# Altium PCB BD658T_AMP_ES4_220615_F.PcbDoc (part 3 of 4)
Units mm, origin at the board's own origin, x right, y up, seen from the top; angles counter-clockwise.
Board outline 153 x 112 mm, 4 copper layers (TOP, LAYER2, LAYER3, BOTTOM), stack 1.59 mm thick; 286 components, 184 nets, 896 pads, 614 vias.
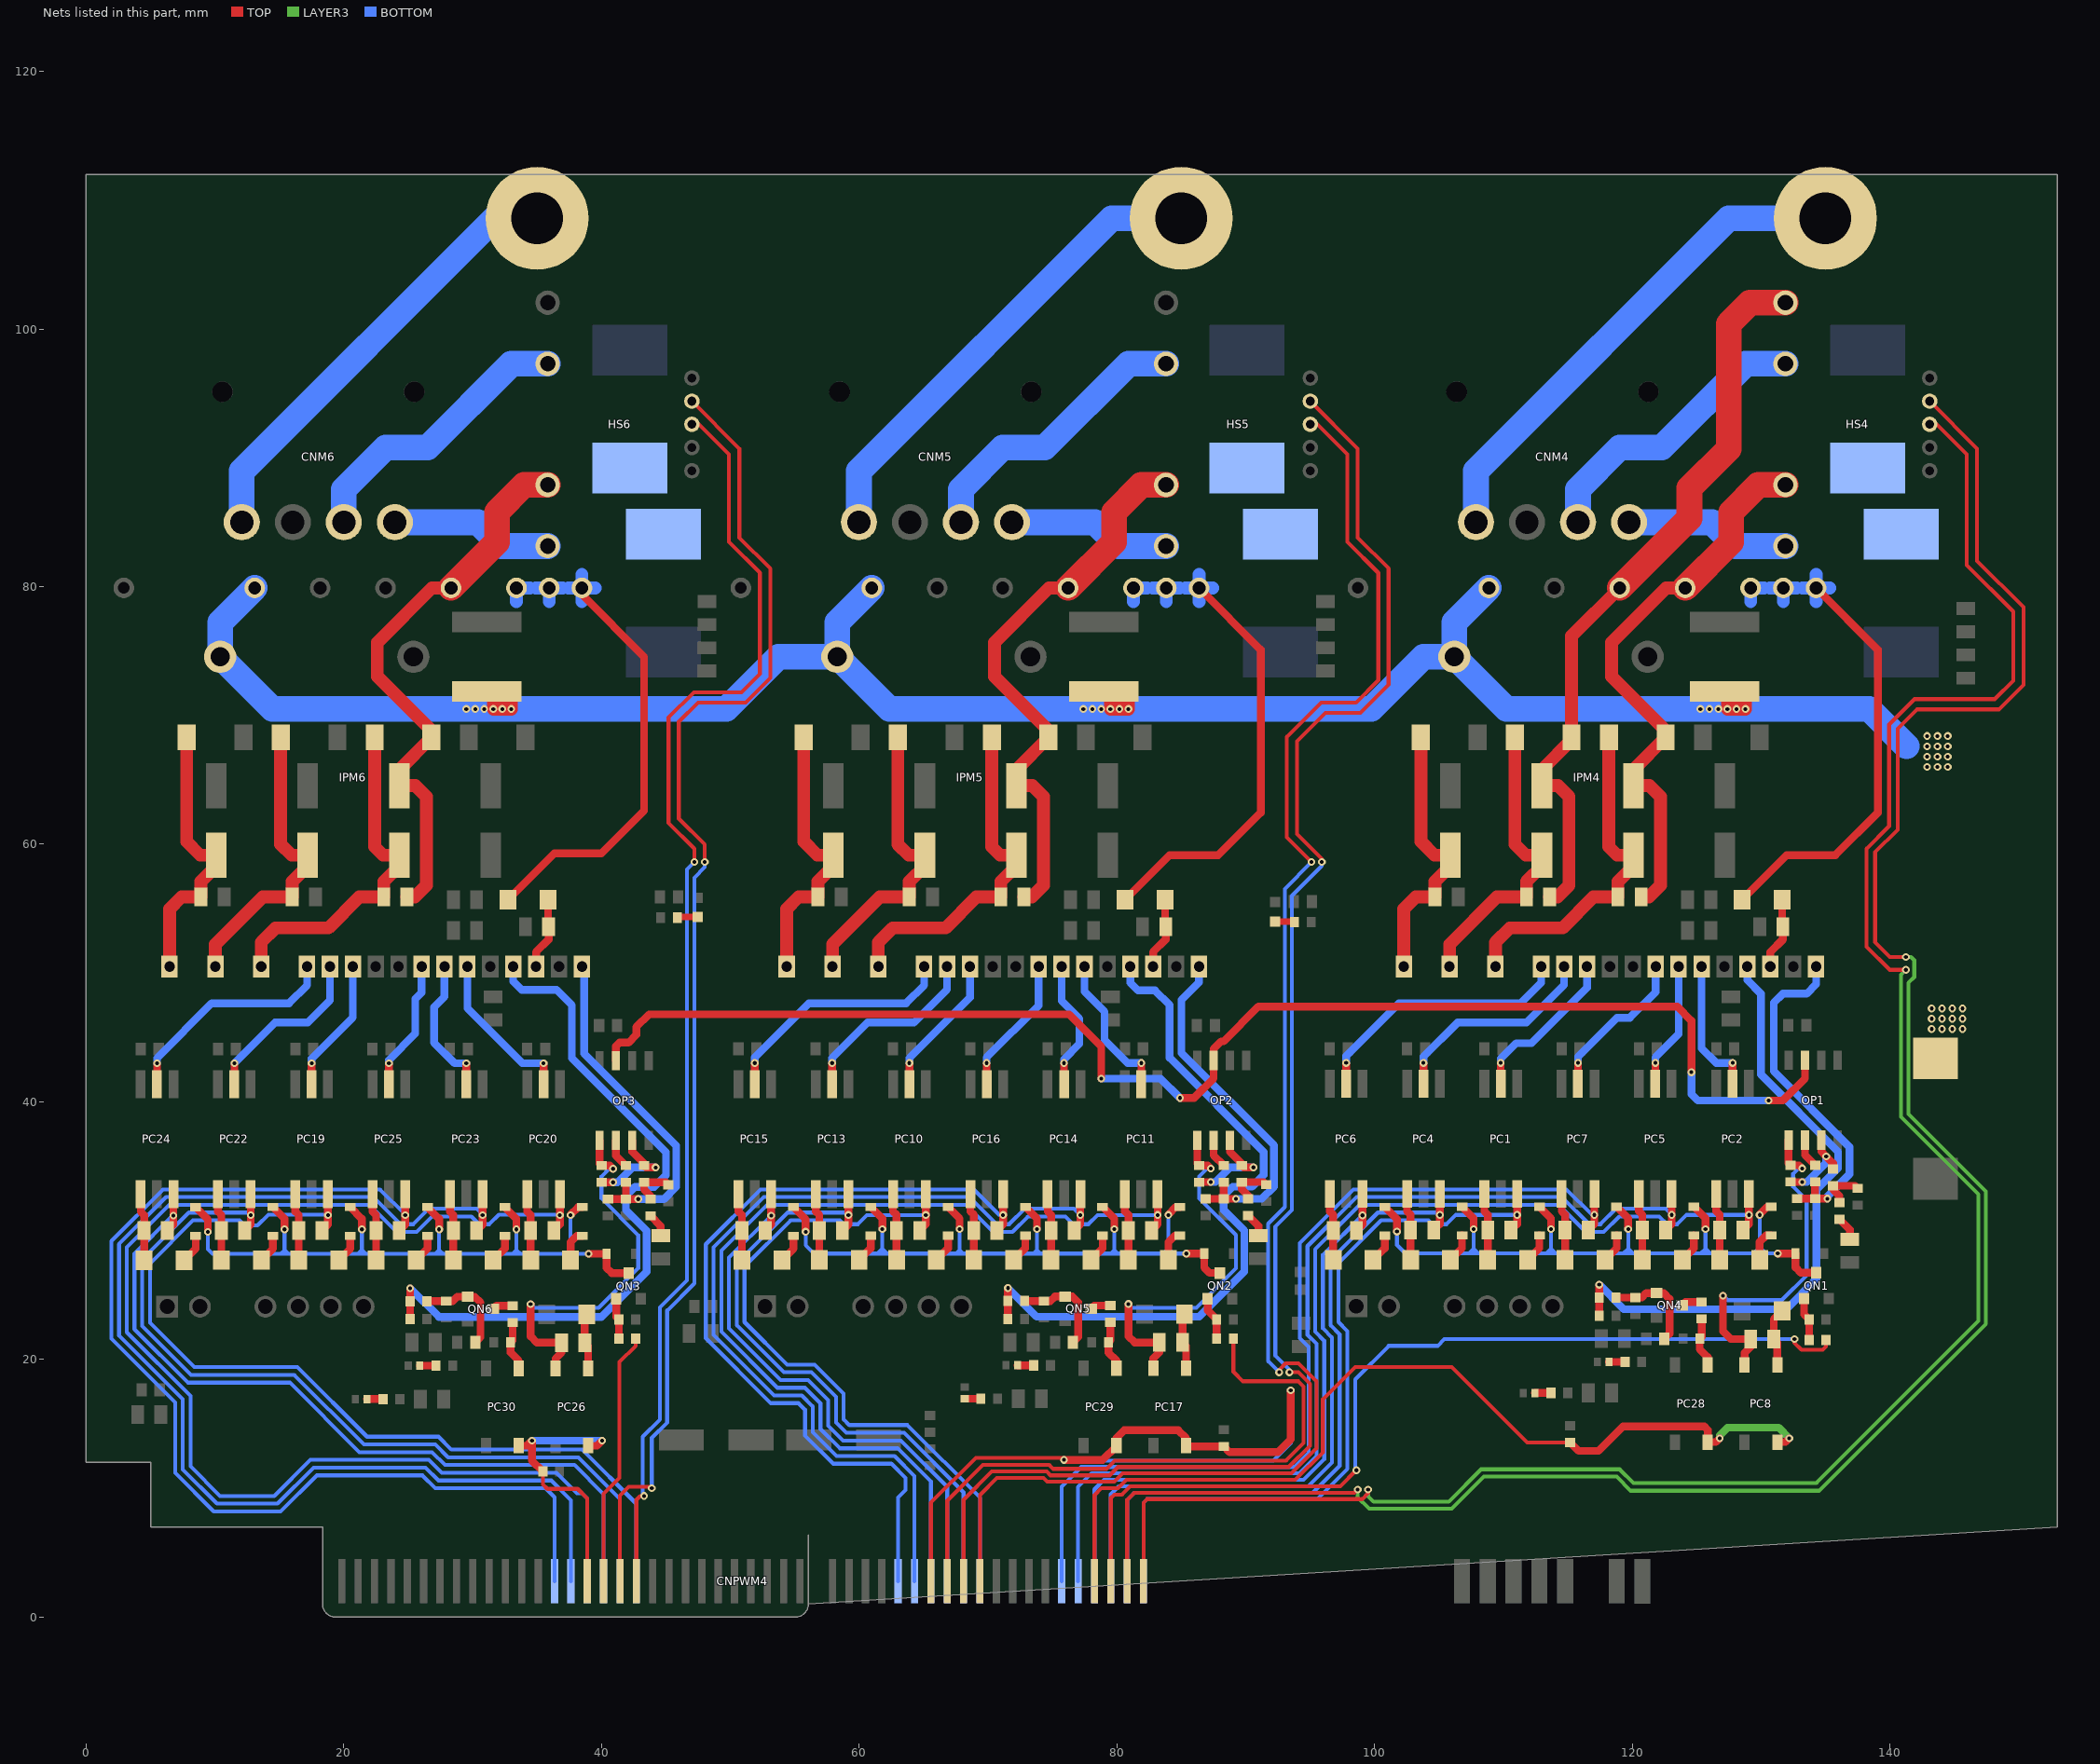
[diagram p5: the nets of this part, all layers, seen from the top]

## Via types
v1: diameter 0.6, hole 0.3, TOP to BOTTOM, 546 vias
v2: diameter 0.4, hole 0.4, TOP to BOTTOM, 56 vias
v3: diameter 6.5, hole 6.5, TOP to BOTTOM, 6 vias
v4: diameter 0.1/0.1/0.1/0.1 (per signal layer), hole 4, TOP to BOTTOM, 4 vias
v5: diameter 4, hole 4, TOP to BOTTOM, 2 vias

## Nets (pads, with @x,y where several pads share a name; then routed paths per layer and width w, separated by ;. In a path a pad name is that pad's centre, name@x,y a point inside that pad or via, vN(x,y) a via of type N, cw(c..) or ccw(c..) an arc to the next point about the centre after c; other vN are vias at no path point) (continued)
FLT4: CNPWM4.8 PC8.4 PC28.4 R19.1 | length 73.7
  TOP w0.3: CNPWM4.8@78.266,2.775 78.266,9.466 78.8,10 80.1,10 80.748,10.649 93.849,10.649 96,12.8 96,16.9 98.5,19.4 106,19.4 111.85,13.55 R19.1@115.2,13.55
  TOP w0.6: R19.1@115.2,13.55 115.85,12.9 117.4,12.9 119.3,14.8 125.6,14.8 125.87,14.53 PC28.4@125.87,13.577 126.5,13.577 v1(126.8,13.877) ; PC8.4@131.27,13.577 131.9,13.577 v1(132.2,13.877)
  LAYER3 w0.6: v1(126.8,13.877) 126.8,14.1 127.4,14.7 131.377,14.7 v1(132.2,13.877)
FLT5: CNPWM4.28 PC17.4 PC29.4 R50.1 | length 64.4
  TOP w0.3: CNPWM4.28@65.566,2.775 65.566,8.866 69.05,12.35 75.75,12.35 v1(75.9,12.2)
  TOP w0.6: v1(75.9,12.2) 78.9,12.2 79.97,13.27 PC29.4@79.97,13.314 79.97,13.9 80.57,14.5 84.77,14.5 85.37,13.9 PC17.4@85.37,13.314 85.434,13.25 R50.1@88.3,13.25 88.75,12.8 92.5,12.8 93.5,13.8 v1(93.5,17.6)
  BOTTOM w0.3: v1(75.9,12.2) 75.951,12.149 92.149,12.149 93.5,13.5 v1(93.5,17.6)
FLT6: CNPWM4.68 PC26.4 PC30.4 R81.1 | length 22
  TOP w0.3: R81.1@35.45,11.3 35.45,10.3 35.8,9.95 38.15,9.95 38.896,9.204 CNPWM4.68@38.896,2.775
  TOP w0.6: PC30.4@33.57,13.3 34.2,13.3 v1(34.6,13.7) 34.6,12.15 R81.1@35.45,11.3 ; PC26.4@38.97,13.3 39.65,13.3 v1(40.05,13.7)
  BOTTOM w0.6: v1(34.6,13.7) v1(40.05,13.7)
IPM_UN4: IPM4.12 PC2.5 | length 10.9
  TOP w0.6: PC2.5@127.8,41.393 v1(127.8,43.023)
  BOTTOM w0.6: IPM4.12@125.39,50.5 125.39,44.16 126.527,43.023 v1(127.8,43.023)
IPM_UN5: IPM5.12 PC11.5 | length 11.6
  TOP w0.6: PC11.5@81.9,41.379 v1(81.9,43.009)
  BOTTOM w0.6: IPM5.12@77.49,50.5 77.49,48.56 79.05,47 79.05,44.8 80.841,43.009 v1(81.9,43.009)
IPM_UN6: IPM6.12 PC20.5 | length 12.5
  TOP w0.6: PC20.5@35.5,41.37 v1(35.5,43)
  BOTTOM w0.6: IPM6.12@29.59,50.5 29.59,47.26 33.85,43 v1(35.5,43)
IPM_UP4: IPM4.7 PC1.5 | length 12.6
  TOP w0.6: PC1.5@109.8,41.393 v1(109.8,43.023)
  BOTTOM w0.6: v1(109.8,43.023) 109.8,43.35 111,44.55 112.2,44.55 116.5,48.85 IPM4.7@116.5,50.5
IPM_UP5: IPM5.7 PC10.5 | length 11.1
  TOP w0.6: PC10.5@63.9,41.379 v1(63.9,43.009)
  BOTTOM w0.6: v1(63.9,43.009) 63.9,43.4 68.6,48.1 IPM5.7@68.6,50.5
IPM_UP6: IPM6.7 PC19.5 | length 10.5
  TOP w0.6: PC19.5@17.5,41.37 v1(17.5,43)
  BOTTOM w0.6: v1(17.5,43) 17.5,43.35 20.7,46.55 IPM6.7@20.7,50.5
IPM_VN4: IPM4.11 PC5.5 | length 9.9
  TOP w0.6: PC5.5@121.8,41.393 v1(121.8,43.023)
  BOTTOM w0.6: v1(121.8,43.023) 121.8,43.45 123.612,45.262 IPM4.11@123.612,50.5
IPM_VN5: IPM5.11 PC14.5 | length 10.2
  TOP w0.6: PC14.5@75.9,41.379 v1(75.9,43.009)
  BOTTOM w0.6: IPM5.11@75.712,50.5 75.712,47.838 77.1,46.45 77.1,44.5 75.9,43.3 v1(75.9,43.009)
IPM_VN6: IPM6.11 PC23.5 | length 11
  TOP w0.6: PC23.5@29.5,41.37 v1(29.5,43)
  BOTTOM w0.6: IPM6.11@27.812,50.5 27.812,48.162 27,47.35 27,44.6 28.6,43 v1(29.5,43)
IPM_VP4: IPM4.6 PC4.5 | length 16.8
  TOP w0.6: PC4.5@103.8,41.393 v1(103.8,43.023)
  BOTTOM w0.6: v1(103.8,43.023) 103.8,43.5 106.45,46.15 111.8,46.15 114.722,49.072 IPM4.6@114.722,50.5
IPM_VP5: IPM5.6 PC13.5 | length 14.9
  TOP w0.6: PC13.5@57.9,41.379 v1(57.9,43.009)
  BOTTOM w0.6: v1(57.9,43.009) 57.9,43.4 60.65,46.15 64.25,46.15 66.822,48.722 IPM5.6@66.822,50.5
IPM_VP6: IPM6.6 PC22.5 | length 13.7
  TOP w0.6: PC22.5@11.5,41.37 v1(11.5,43)
  BOTTOM w0.6: v1(11.5,43) 14.65,46.15 17.2,46.15 18.922,47.872 IPM6.6@18.922,50.5
IPM_WN4: IPM4.10 PC7.5 | length 12.2
  TOP w0.6: PC7.5@115.8,41.393 v1(115.8,43.023)
  BOTTOM w0.6: v1(115.8,43.023) 115.8,43.5 118.825,46.525 119.825,46.525 121.834,48.534 IPM4.10@121.834,50.5
IPM_WN5: IPM5.10 PC16.5 | length 10.8
  TOP w0.6: PC16.5@69.9,41.379 v1(69.9,43.009)
  BOTTOM w0.6: v1(69.9,43.009) 69.9,43.45 73.934,47.484 IPM5.10@73.934,50.5
IPM_WN6: IPM6.10 PC25.5 | length 10.2
  TOP w0.6: PC25.5@23.5,41.37 v1(23.5,43)
  BOTTOM w0.6: v1(23.5,43) 23.5,43.25 25.55,45.3 25.55,48 26.034,48.484 IPM6.10@26.034,50.5
IPM_WP4: IPM4.5 PC6.5 | length 20.9
  TOP w0.6: PC6.5@97.8,41.393 v1(97.8,43.023)
  BOTTOM w0.6: v1(97.8,43.023) 97.8,43.55 101.9,47.65 111.35,47.65 112.944,49.244 IPM4.5@112.944,50.5
IPM_WP5: IPM5.5 PC15.5 | length 19
  TOP w0.6: PC15.5@51.9,41.379 v1(51.9,43.009)
  BOTTOM w0.6: v1(51.9,43.009) 51.9,43.45 56.1,47.65 63.65,47.65 65.044,49.044 IPM5.5@65.044,50.5
IPM_WP6: IPM6.5 PC24.5 | length 17.5
  TOP w0.6: PC24.5@5.5,41.37 v1(5.5,43)
  BOTTOM w0.6: v1(5.5,43) 5.5,43.4 9.75,47.65 15.75,47.65 17.144,49.044 IPM6.5@17.144,50.5
N274757: R25.2 R26.2 R27.1 | length 3.5
  TOP w0.6: R25.2@136.1,32.177 136.1,32.7 135.6,33.2 R26.2@135.6,33.477 137.3,33.477 R27.1@137.5,33.277
N274773: D1.2 D2.2 D3.2 D4.2 D5.2 D6.2 D7.2 QN1.3 | length 63.2
  TOP w0.6: D5.2@100.8,31.838 101.75,30.888 v1(101.75,29.923) ; D3.2@106.8,31.852 107.7,30.952 v1(107.7,30.123) ; D1.2@112.8,31.852 113.7,30.952 v1(113.7,30.123) ; D6.2@118.8,31.852 119.7,30.952 v1(119.7,30.123) ; D4.2@124.8,31.852 125.7,30.952 v1(125.7,30.123) ; v1(129.9,31.223) 129.9,31.262 130.49,31.852 D2.2@130.8,31.852 ; v1(131.3,28.227) D7.2@132.685,28.227 132.685,27.142 133.1,26.727 QN1.3@134.3,26.727
  BOTTOM w0.3: v1(101.75,29.923) 101.75,28.877 102.4,28.227 107.327,28.227 ; v1(107.7,30.123) 107.7,28.6 ; v1(113.7,30.123) 113.7,28.6 ; v1(119.7,30.123) 119.7,28.6 ; v1(125.7,30.123) 125.7,28.6 ; v1(129.9,31.223) 129.9,28.7 ; v1(131.3,28.227) 130.373,28.227 ; 107.327,28.227 107.7,28.227 ; 107.327,28.227 107.7,28.6 ; 107.7,28.227 107.7,28.6 ; 107.7,28.227 108.072,28.227 ; 107.7,28.6 108.072,28.227 ; 108.072,28.227 113.327,28.227 ; 113.327,28.227 113.7,28.6 ; 113.327,28.227 113.7,28.227 ; 113.7,28.227 113.7,28.6 ; 113.7,28.227 114.072,28.227 ; 113.7,28.6 114.072,28.227 ; 114.072,28.227 119.327,28.227 ; 119.327,28.227 119.7,28.6 ; 119.327,28.227 119.7,28.227 ; 119.7,28.227 120.073,28.227 ; 119.7,28.227 119.7,28.6 ; 119.7,28.6 120.073,28.227 ; 120.073,28.227 125.327,28.227 ; 125.327,28.227 125.7,28.6 ; 125.327,28.227 125.7,28.227 ; 125.7,28.227 125.7,28.6 ; 125.7,28.227 126.073,28.227 ; 125.7,28.6 126.073,28.227 ; 126.073,28.227 129.427,28.227 ; 129.427,28.227 129.9,28.227 ; 129.427,28.227 129.9,28.7 ; 129.9,28.227 129.9,28.7 ; 129.9,28.227 130.373,28.227 ; 129.9,28.7 130.373,28.227
N275195: OP1.2 R29.1 | length 2.3
  TOP w0.6: OP1.2@133.415,37.027 133.415,35.862 R29.1@134.2,35.077
N276741: PC1.1 R3.1 R4.2 | length 5.2
  TOP w0.6: PC1.1@108.53,32.853 108.53,31.507 108.8,31.237 R3.1@108.8,30.037 R4.2@108.8,27.737
N277069: D1.1 R4.1 | length 2.3
  TOP w0.6: R4.1@111.9,27.737 112.8,28.637 D1.1@112.8,29.622
N277219: PC2.1 R5.2 R6.1 | length 5.2
  TOP w0.6: PC2.1@126.53,32.853 126.53,31.507 126.8,31.237 R6.1@126.8,30.037 R5.2@126.8,27.737
N277271: D2.1 R5.1 | length 2.5
  TOP w0.6: R5.1@129.9,27.737 129.9,29.123 130.398,29.622 D2.1@130.8,29.622
N277453: PC4.1 R9.2 R10.1 | length 5.2
  TOP w0.6: PC4.1@102.53,32.853 102.53,31.507 102.8,31.237 R10.1@102.8,30.037 R9.2@102.8,27.737
N277477: D3.1 R9.1 | length 2.3
  TOP w0.6: R9.1@105.9,27.737 106.8,28.637 D3.1@106.8,29.622
N277499: PC5.1 R11.2 R12.1 | length 5.2
  TOP w0.6: PC5.1@120.53,32.853 120.53,31.507 120.8,31.237 R12.1@120.8,30.037 R11.2@120.8,27.737
N277523: D4.1 R11.1 | length 2.3
  TOP w0.6: R11.1@123.9,27.737 124.8,28.637 D4.1@124.8,29.622
N277545: PC6.1 R13.2 R14.1 | length 5.2
  TOP w0.6: PC6.1@96.53,32.853 96.53,31.493 96.8,31.223 R14.1@96.8,30.023 R13.2@96.8,27.723
N277565: D5.1 R13.1 | length 2.3
  TOP w0.6: R13.1@99.9,27.723 100.8,28.623 D5.1@100.8,29.608
N277587: PC7.1 R16.2 R18.1 | length 5.2
  TOP w0.6: PC7.1@114.53,32.853 114.53,31.507 114.8,31.237 R18.1@114.8,30.037 R16.2@114.8,27.737
N277615: D6.1 R16.1 | length 2.3
  TOP w0.6: R16.1@117.9,27.737 118.8,28.637 D6.1@118.8,29.622
N277743: OP1.3 R23.2 R26.1 | length 6.5
  TOP w0.6: R23.2@132.3,33.777 v1(133.2,33.777) ; OP1.3@134.685,37.027 134.685,36.142 v1(135.063,35.764) 135.6,35.227 R26.1@135.6,34.777
  BOTTOM w0.6: v1(133.2,33.777) 133.577,33.777 135.063,35.263 v1(135.063,35.764)
N277793: OP1.1 PC8.2 R23.1 R24.2 | length 27
  TOP w0.6: v1(127.05,24.95) 127.05,22.177 127.65,21.577 R24.2@129.2,21.577 129.2,20.977 128.73,20.507 PC8.2@128.73,19.577 ; OP1.1@132.145,37.027 132.145,35.232 R23.1@132.3,35.077 132.95,35.077 v1(133.2,34.827)
  BOTTOM w0.3: v1(127.05,24.95) 127.4,24.6 131.62,24.6 133.55,26.53 133.55,32.35 132.5,33.4 132.5,34.428 132.9,34.827 v1(133.2,34.827)
N277881: PC8.1 R20.2 R24.1 | length 4.6
  TOP w0.6: PC8.1@131.27,19.577 131.27,21.307 R24.1@131,21.577 131,23.127 R20.2@131.65,23.777
N278429: QN1.1 R15.2 R17.2 | length 3.4
  TOP w0.6: QN1.1@133.35,24.727 133.35,23.5 R15.2@133.75,23.1 R17.2@133.75,21.5
N297272: C4.1 EC5.1 IPM4.2 ZD3.1 | length 21.9
  TOP w1: IPM4.2@102.276,50.5 102.276,54.976 103.2,55.9 C4.1@104.7,55.9 104.7,57.1 105.9,58.3 EC5.1@105.9,59.15 104.65,59.15 103.6,60.2 ZD3.1@103.6,68.3
N297364: C3.1 EC4.1 IPM4.3 ZD2.1 | length 23.7
  TOP w1: IPM4.3@105.832,50.5 105.832,52.232 109.5,55.9 C3.1@111.8,55.9 111.8,57.1 113,58.3 EC4.1@113,59.15 111.75,59.15 110.9,60 ZD2.1@110.9,68.3
N297450: C2.1 EC3.1 IPM4.4 ZD1.1 | length 27.3
  TOP w1: IPM4.4@109.388,50.5 109.388,52.388 110.5,53.5 114.6,53.5 117,55.9 C2.1@118.9,55.9 118.9,57.1 120.1,58.3 EC3.1@120.1,59.15 118.85,59.15 118.2,59.8 ZD1.1@118.2,68.3
N298018: IPM4.18 IPM4.19 IPM4.20 R28.2 RCL1.2 RCL2.2 | length 42.2
  TOP w0.6: R28.2@128.55,55.7 132,59.15 135.78,59.15 139.08,62.45 139.08,75.1 IPM4.18@134.28,79.9
  BOTTOM w1: 129.2,78.849 IPM4.20@129.2,79.9 130.251,79.9 ; 130.689,79.9 IPM4.19@131.74,79.9 ; 131.74,78.849 IPM4.19@131.74,79.9 ; 132.791,79.9 IPM4.19@131.74,79.9 ; 133.229,79.9 IPM4.18@134.28,79.9 ; 134.28,78.849 IPM4.18@134.28,79.9 ; 134.28,80.951 IPM4.18@134.28,79.9 ; 135.331,79.9 IPM4.18@134.28,79.9
N298066: C10.1 IPM4.15 R28.1 | length 5.6
  TOP w0.6: IPM4.15@130.724,50.5 130.724,51.624 131.7,52.6 C10.1@131.7,53.6 131.65,53.65 R28.1@131.65,55.7
N317023: IPM5.18 IPM5.19 IPM5.20 R63.2 RCL3.2 RCL4.2 | length 42.2
  TOP w0.6: R63.2@80.65,55.7 84.1,59.15 87.88,59.15 91.18,62.45 91.18,75.1 IPM5.18@86.38,79.9
  BOTTOM w1: 81.3,78.849 IPM5.20@81.3,79.9 82.351,79.9 ; 82.789,79.9 IPM5.19@83.84,79.9 ; 83.84,78.849 IPM5.19@83.84,79.9 ; 84.891,79.9 IPM5.19@83.84,79.9 ; 85.329,79.9 IPM5.18@86.38,79.9 ; 86.38,78.849 IPM5.18@86.38,79.9 ; 86.38,80.951 IPM5.18@86.38,79.9 ; 87.431,79.9 IPM5.18@86.38,79.9
N317071: C22.1 IPM5.15 R63.1 | length 5.6
  TOP w0.6: IPM5.15@82.824,50.5 82.824,51.624 83.8,52.6 C22.1@83.8,53.6 83.75,53.65 R63.1@83.75,55.7
N317625: R56.2 R57.2 R58.1 | length 3.5
  TOP w0.6: R56.2@90.2,32.464 90.2,32.714 89.7,33.214 R57.2@89.7,33.764 91.4,33.764 R58.1@91.6,33.564
N317641: D9.2 D10.2 D11.2 D12.2 D13.2 D14.2 D15.2 QN2.3 | length 61.8
  TOP w0.6: D13.2@54.9,31.824 55.85,30.875 v1(55.85,29.909) ; D11.2@60.9,31.838 61.8,30.938 v1(61.8,30.109) ; D9.2@66.9,31.838 67.8,30.938 v1(67.8,30.109) ; D14.2@72.9,31.838 73.8,30.938 v1(73.8,30.109) ; D12.2@78.9,31.838 79.8,30.938 v1(79.8,30.109) ; v1(84,31.209) 84,31.248 84.59,31.838 D10.2@84.9,31.838 ; v1(85.4,28.214) D15.2@86.785,28.214 86.785,27.129 87.2,26.714 QN2.3@88,26.714
  BOTTOM w0.3: v1(55.85,29.909) 55.85,28.864 56.5,28.214 61.414,28.214 ; v1(61.8,30.109) 61.8,28.6 ; v1(67.8,30.109) 67.8,28.5 ; v1(73.8,30.109) 73.8,28.5 ; v1(79.8,30.109) 79.8,28.5 ; v1(84,31.209) 84,28.6 ; v1(85.4,28.214) 84.386,28.214 ; 61.414,28.214 61.8,28.214 ; 61.414,28.214 61.8,28.6 ; 61.8,28.214 62.186,28.214 ; 61.8,28.214 61.8,28.6 ; 61.8,28.6 62.186,28.214 ; 62.186,28.214 67.514,28.214 ; 67.514,28.214 67.8,28.5 ; 67.514,28.214 67.8,28.214 ; 67.8,28.214 68.086,28.214 ; 67.8,28.214 67.8,28.5 ; 67.8,28.5 68.086,28.214 ; 68.086,28.214 73.514,28.214 ; 73.514,28.214 73.8,28.5 ; 73.514,28.214 73.8,28.214 ; 73.8,28.214 73.8,28.5 ; 73.8,28.214 74.086,28.214 ; 73.8,28.5 74.086,28.214 ; 74.086,28.214 79.514,28.214 ; 79.514,28.214 79.8,28.5 ; 79.514,28.214 79.8,28.214 ; 79.8,28.214 79.8,28.5 ; 79.8,28.214 80.086,28.214 ; 79.8,28.5 80.086,28.214 ; 80.086,28.214 83.614,28.214 ; 83.614,28.214 84,28.6 ; 83.614,28.214 84,28.214 ; 84,28.214 84,28.6 ; 84,28.214 84.386,28.214 ; 84,28.6 84.386,28.214
N317849: OP2.2 R59.1 | length 2.3
  TOP w0.6: OP2.2@87.515,37.014 87.515,35.849 R59.1@88.3,35.064
N319015: PC10.1 R34.1 R35.2 | length 5.2
  TOP w0.6: PC10.1@62.63,32.839 62.63,31.493 62.9,31.223 R34.1@62.9,30.023 R35.2@62.9,27.723
N319043: D9.1 R35.1 | length 2.3
  TOP w0.6: R35.1@66,27.723 66.9,28.623 D9.1@66.9,29.608
N319065: PC11.1 R36.2 R37.1 | length 5.2
  TOP w0.6: PC11.1@80.63,32.839 80.63,31.493 80.9,31.223 R37.1@80.9,30.023 R36.2@80.9,27.723
N319089: D10.1 R36.1 | length 2.5
  TOP w0.6: R36.1@84,27.723 84,29.11 84.499,29.608 D10.1@84.9,29.608
N319111: PC13.1 R40.2 R41.1 | length 5.2
  TOP w0.6: PC13.1@56.63,32.839 56.63,31.493 56.9,31.223 R41.1@56.9,30.023 R40.2@56.9,27.723
N319135: D11.1 R40.1 | length 2.3
  TOP w0.6: R40.1@60,27.723 60.9,28.623 D11.1@60.9,29.608
N319157: PC14.1 R42.2 R43.1 | length 5.2
  TOP w0.6: PC14.1@74.63,32.839 74.63,31.493 74.9,31.223 R43.1@74.9,30.023 R42.2@74.9,27.723
N319181: D12.1 R42.1 | length 2.3
  TOP w0.6: R42.1@78,27.723 78.9,28.623 D12.1@78.9,29.608
N319203: PC15.1 R44.2 R45.1 | length 5.2
  TOP w0.6: PC15.1@50.63,32.839 50.63,31.479 50.9,31.209 R45.1@50.9,30.009 R44.2@50.9,27.709
N319223: D13.1 R44.1 | length 2.3
  TOP w0.6: R44.1@54,27.709 54.9,28.609 D13.1@54.9,29.594
N319245: PC16.1 R47.2 R49.1 | length 5.2
  TOP w0.6: PC16.1@68.63,32.839 68.63,31.493 68.9,31.223 R49.1@68.9,30.023 R47.2@68.9,27.723
N319273: D14.1 R47.1 | length 2.3
  TOP w0.6: R47.1@72,27.723 72.9,28.623 D14.1@72.9,29.608
N319383: OP2.3 R54.2 R57.1 | length 8
  TOP w0.6: R54.2@86.4,33.764 v1(87.3,33.764) ; OP2.3@88.785,37.014 88.785,36.129 89.7,35.214 R57.1@89.7,35.064 89.85,34.914 v1(90.6,34.914)
  BOTTOM w0.6: v1(87.3,33.764) 87.65,33.764 88.8,34.914 v1(90.6,34.914)
N319451: OP2.1 PC17.2 R54.1 R55.2 | length 29.5
  TOP w0.6: v1(80.9,24.3) 80.9,21.8 81.386,21.314 R55.2@83.3,21.314 83.3,20.55 82.83,20.08 PC17.2@82.83,19.314 ; OP2.1@86.245,37.014 86.245,35.218 R54.1@86.4,35.064 87.05,35.064 v1(87.3,34.814)
  BOTTOM w0.3: v1(80.9,24.3) 81.186,24.014 86.181,24.014 89.25,27.083 89.25,29.664 86.4,32.514 86.4,34.214 87,34.814 v1(87.3,34.814)
N319539: PC17.1 R51.2 R55.1 | length 4.4
  TOP w0.6: R51.2@85.25,23.514 85.1,23.364 R55.1@85.1,21.314 85.37,21.044 PC17.1@85.37,19.314
N320047: QN2.1 R46.2 R48.2 | length 3.4
  TOP w0.6: QN2.1@87.05,24.714 87.05,23.814 R46.2@87.75,23.114 R48.2@87.75,21.614
N320271: C16.1 EC9.1 IPM5.2 ZD7.1 | length 21.9
  TOP w1: IPM5.2@54.376,50.5 54.376,54.976 55.3,55.9 C16.1@56.8,55.9 56.8,57.1 58,58.3 EC9.1@58,59.15 56.75,59.15 55.7,60.2 ZD7.1@55.7,68.3
N320357: C15.1 EC8.1 IPM5.3 ZD6.1 | length 23.7
  TOP w1: IPM5.3@57.932,50.5 57.932,52.232 61.6,55.9 C15.1@63.9,55.9 63.9,57.1 65.1,58.3 EC8.1@65.1,59.15 63.85,59.15 63,60 ZD6.1@63,68.3
N320431: C14.1 EC7.1 IPM5.4 ZD5.1 | length 27.3
  TOP w1: IPM5.4@61.488,50.5 61.488,52.388 62.6,53.5 66.7,53.5 69.1,55.9 C14.1@71,55.9 71,57.1 72.2,58.3 EC7.1@72.2,59.15 70.95,59.15 70.3,59.8 ZD5.1@70.3,68.3
N407898: IPM6.18 IPM6.19 IPM6.20 R90.2 RCL5.2 RCL6.2 | length 42.2
  TOP w0.6: R90.2@32.75,55.7 36.35,59.3 40,59.3 43.3,62.6 43.3,74.55 38.48,79.37 IPM6.18@38.48,79.9
  BOTTOM w1: 33.4,78.849 IPM6.20@33.4,79.9 34.451,79.9 ; 34.889,79.9 IPM6.19@35.94,79.9 ; 35.94,78.849 IPM6.19@35.94,79.9 ; 36.991,79.9 IPM6.19@35.94,79.9 ; 37.429,79.9 IPM6.18@38.48,79.9 ; 38.48,78.849 IPM6.18@38.48,79.9 ; 38.48,80.951 IPM6.18@38.48,79.9 ; 39.531,79.9 IPM6.18@38.48,79.9
N407910: C34.1 IPM6.15 R90.1 | length 5.6
  TOP w0.6: IPM6.15@34.924,50.5 34.924,51.624 35.9,52.6 C34.1@35.9,53.6 35.85,53.65 R90.1@35.85,55.7
N408014: R87.2 R88.2 R89.1 | length 3.5
  TOP w0.6: R87.2@43.8,32.45 43.8,32.7 43.3,33.2 R88.2@43.3,33.75 45,33.75 R89.1@45.2,33.55
N408022: D17.2 D18.2 D19.2 D20.2 D21.2 D22.2 D23.2 QN3.3 | length 62.1
  TOP w0.6: D21.2@8.5,31.815 9.45,30.865 v1(9.45,29.9) ; D19.2@14.5,31.829 15.4,30.929 v1(15.4,30.1) ; D17.2@20.5,31.829 21.4,30.929 v1(21.4,30.1) ; D22.2@26.5,31.829 27.4,30.929 v1(27.4,30.1) ; D20.2@32.5,31.829 33.4,30.929 v1(33.4,30.1) ; v1(37.6,31.2) 37.6,31.239 38.19,31.829 D18.2@38.5,31.829 ; v1(39,28.2) D23.2@40.385,28.2 40.385,27.115 40.8,26.7 QN3.3@42.1,26.7
  BOTTOM w0.3: v1(9.45,29.9) 9.45,28.55 9.8,28.2 15.1,28.2 ; v1(15.4,30.1) 15.4,28.5 ; v1(21.4,30.1) 21.4,28.5 ; v1(27.4,30.1) 27.4,28.5 ; v1(33.4,30.1) 33.4,28.5 ; v1(37.6,31.2) 37.6,28.5 ; v1(39,28.2) 37.9,28.2 ; 15.1,28.2 15.4,28.5 ; 15.1,28.2 15.4,28.2 ; 15.4,28.2 15.4,28.5 ; 15.4,28.2 15.7,28.2 ; 15.4,28.5 15.7,28.2 ; 15.7,28.2 21.1,28.2 ; 21.1,28.2 21.4,28.5 ; 21.1,28.2 21.4,28.2 ; 21.4,28.2 21.7,28.2 ; 21.4,28.2 21.4,28.5 ; 21.4,28.5 21.7,28.2 ; 21.7,28.2 27.1,28.2 ; 27.1,28.2 27.4,28.2 ; 27.1,28.2 27.4,28.5 ; 27.4,28.2 27.4,28.5 ; 27.4,28.2 27.7,28.2 ; 27.4,28.5 27.7,28.2 ; 27.7,28.2 33.1,28.2 ; 33.1,28.2 33.4,28.5 ; 33.1,28.2 33.4,28.2 ; 33.4,28.2 33.4,28.5 ; 33.4,28.2 33.7,28.2 ; 33.4,28.5 33.7,28.2 ; 33.7,28.2 37.3,28.2 ; 37.3,28.2 37.6,28.5 ; 37.3,28.2 37.6,28.2 ; 37.6,28.2 37.6,28.5 ; 37.6,28.2 37.9,28.2 ; 37.6,28.5 37.9,28.2
N408032: OP3.2 R91.1 | length 2.3
  TOP w0.6: OP3.2@41.115,37 41.115,35.835 R91.1@41.9,35.05
N408064: PC19.1 R65.2 R66.1 | length 5.2
  TOP w0.6: PC19.1@16.23,32.83 16.23,31.484 16.5,31.214 R66.1@16.5,30.014 R65.2@16.5,27.714
N408078: D17.1 R65.1 | length 2.3
  TOP w0.6: R65.1@19.6,27.714 20.5,28.614 D17.1@20.5,29.599
N408088: PC20.1 R67.2 R68.1 | length 5.2
  TOP w0.6: PC20.1@34.23,32.83 34.23,31.484 34.5,31.214 R68.1@34.5,30.014 R67.2@34.5,27.714
N408100: D18.1 R67.1 | length 2.5
  TOP w0.6: R67.1@37.6,27.714 37.6,29.1 38.098,29.599 D18.1@38.5,29.599
N408110: PC22.1 R71.2 R72.1 | length 5.2
  TOP w0.6: PC22.1@10.23,32.83 10.23,31.484 10.5,31.214 R72.1@10.5,30.014 R71.2@10.5,27.714
N408122: D19.1 R71.1 | length 2.3
  TOP w0.6: R71.1@13.6,27.714 14.5,28.614 D19.1@14.5,29.599
N408132: PC23.1 R73.1 R74.2 | length 5.2
  TOP w0.6: PC23.1@28.23,32.83 28.23,31.484 28.5,31.214 R73.1@28.5,30.014 R74.2@28.5,27.714
N408144: D20.1 R74.1 | length 2.3
  TOP w0.6: R74.1@31.6,27.714 32.5,28.614 D20.1@32.5,29.599
N408154: PC24.1 R75.2 R76.1 | length 5.2
  TOP w0.6: PC24.1@4.23,32.83 4.23,31.47 4.5,31.2 R76.1@4.5,30 R75.2@4.5,27.7
N408164: D21.1 R75.1 | length 2.3
  TOP w0.6: R75.1@7.6,27.7 8.5,28.6 D21.1@8.5,29.585
N408174: PC25.1 R78.2 R80.1 | length 5.2
  TOP w0.6: PC25.1@22.23,32.83 22.23,31.484 22.5,31.214 R80.1@22.5,30.014 R78.2@22.5,27.714
N408188: D22.1 R78.1 | length 2.3
  TOP w0.6: R78.1@25.6,27.714 26.5,28.614 D22.1@26.5,29.599
N408200: OP3.3 R85.2 R88.1 | length 8
  TOP w0.6: R85.2@40,33.75 v1(40.9,33.75) ; OP3.3@42.385,37 42.385,36.115 43.3,35.2 R88.1@43.3,35.05 43.45,34.9 v1(44.2,34.9)
  BOTTOM w0.6: v1(40.9,33.75) 41.25,33.75 42.4,34.9 v1(44.2,34.9)
N408216: OP3.1 PC26.2 R85.1 R86.2 | length 29.5
  TOP w0.6: v1(34.5,24.286) 34.5,21.786 34.986,21.3 R86.2@36.9,21.3 36.9,20.536 36.43,20.066 PC26.2@36.43,19.3 ; OP3.1@39.845,37 39.845,35.205 R85.1@40,35.05 40.65,35.05 v1(40.9,34.8)
  BOTTOM w0.3: v1(34.5,24.286) 34.786,24 39.781,24 42.85,27.069 42.85,29.65 40,32.5 40,34.2 40.6,34.8 v1(40.9,34.8)
N408234: PC26.1 R82.2 R86.1 | length 4.4
  TOP w0.6: R82.2@38.85,23.5 38.7,23.35 R86.1@38.7,21.3 38.97,21.03 PC26.1@38.97,19.3
N408372: QN3.1 R77.2 R79.2 | length 3.2
  TOP w0.6: QN3.1@41.15,24.7 41.15,23.3 R77.2@41.35,23.1 R79.2@41.35,21.6
N408410: C30.1 EC13.1 IPM6.2 ZD11.1 | length 21.9
  TOP w1: IPM6.2@6.476,50.5 6.476,54.976 7.4,55.9 C30.1@8.9,55.9 8.9,57.1 10.1,58.3 EC13.1@10.1,59.15 8.85,59.15 7.8,60.2 ZD11.1@7.8,68.3
N408426: C27.1 EC12.1 IPM6.3 ZD10.1 | length 23.7
  TOP w1: IPM6.3@10.032,50.5 10.032,52.232 13.7,55.9 C27.1@16,55.9 16,57.1 17.2,58.3 EC12.1@17.2,59.15 15.95,59.15 15.1,60 ZD10.1@15.1,68.3
N408442: C26.1 EC11.1 IPM6.4 ZD9.1 | length 27.3
  TOP w1: IPM6.4@13.588,50.5 13.588,52.388 14.7,53.5 18.8,53.5 21.2,55.9 C26.1@23.1,55.9 23.1,57.1 24.3,58.3 EC11.1@24.3,59.15 23.05,59.15 22.4,59.8 ZD9.1@22.4,68.3
N716224: CNM4.4 SP1.1 | length 39.2
  BOTTOM w2: CNM4.4@107.88,85 107.88,88.98 127.5,108.6 SP1.1@135,108.6
N729741: CNM5.4 SP2.1 | length 37.1
  BOTTOM w2: CNM5.4@59.98,85 59.98,88.98 79.6,108.6 SP2.1@85,108.6
N730275: CNM6.4 SP3.1 | length 35
  BOTTOM w2: CNM6.4@12.08,85 12.08,88.98 31.7,108.6 SP3.1@35,108.6
N779594: C37.1 QN4.1 R97.1 R98.2 | length 7.7
  TOP w0.6: R97.1@118.75,24.8 R98.2@120.25,24.8 120.75,24.8 121.1,25.15 QN4.1@121.9,25.15 122.45,25.15 122.9,24.7 122.9,22 C37.1@122.5,21.6
N779688: QN4.3 R99.2 | length 1.6
  TOP w0.6: QN4.3@123.9,24.2 124.15,24.45 R99.2@125.4,24.45
N779762: PC28.1 R99.1 R100.2 | length 3.9
  TOP w0.6: R99.1@125.4,23.15 125.4,21.75 R100.2@125.25,21.6 125.25,20.8 125.87,20.18 PC28.1@125.87,19.577
N780772: C38.1 QN5.1 R101.2 R103.1 | length 7.7
  TOP w0.6: R103.1@72.85,24.536 R101.2@74.35,24.536 74.85,24.536 75.2,24.886 QN5.1@76,24.886 76.55,24.886 77,24.436 77,21.736 C38.1@76.6,21.336
N780866: QN5.3 R104.2 | length 1.6
  TOP w0.6: QN5.3@78,23.936 78.25,24.186 R104.2@79.5,24.186
N780940: PC29.1 R104.1 R105.2 | length 3.9
  TOP w0.6: R104.1@79.5,22.886 79.5,21.486 R105.2@79.35,21.336 79.35,20.536 79.97,19.917 PC29.1@79.97,19.314
N781910: C39.1 QN6.1 R106.2 R108.1 | length 7.7
  TOP w0.6: R108.1@26.45,24.523 R106.2@27.95,24.523 28.45,24.523 28.8,24.873 QN6.1@29.6,24.873 30.15,24.873 30.6,24.423 30.6,21.723 C39.1@30.2,21.323
N782004: QN6.3 R109.2 | length 1.6
  TOP w0.6: QN6.3@31.6,23.923 31.85,24.173 R109.2@33.1,24.173
N782078: PC30.1 R109.1 R110.2 | length 3.9
  TOP w0.6: R109.1@33.1,22.873 33.1,21.473 R110.2@32.95,21.323 32.95,20.523 33.57,19.903 PC30.1@33.57,19.3
N2648760: LED2.1 R2.1 | length 1.6
  TOP w0.5: R2.1@45.9,54.3 45.95,54.35 LED2.1@47.45,54.35
N2651440: LED1.1 R1.1 | length 1.5
  TOP w0.5: LED1.1@92.3,54 93.75,54 R1.1@93.8,53.95
N2749971: R21.2 R25.1 | length 1.9
  TOP w0.6: R25.1@136.1,30.877 136.9,30.077 R21.2@136.9,29.327
N3176691: R52.2 R56.1 | length 1.9
  TOP w0.6: R56.1@90.2,31.164 91,30.364 R52.2@91,29.614
N4096681: R83.2 R87.1 | length 1.9
  TOP w0.6: R87.1@43.8,31.15 44.6,30.35 R83.2@44.6,29.6
N16782848: F15V_4.2 R7.2 | length 1.3
  TOP w0.6: F15V_4.2@112.45,17.4 R7.2@113.7,17.4
N16783130: F5V_4.2 R8.2 | length 1.3
  TOP w0.6: F5V_4.2@118.2,19.8 R8.2@119.45,19.8
N16786569: F15V_5.2 R38.2 | length 1.3
  TOP w0.6: F15V_5.2@68.2,16.95 69.437,16.95 R38.2@69.45,16.936
N16786605: F5V_5.2 R39.2 | length 1.3
  TOP w0.6: F5V_5.2@72.3,19.536 R39.2@73.55,19.536
N16788958: F15V_6.2 R69.2 | length 1.3
  TOP w0.6: F15V_6.2@21.8,16.923 R69.2@23.05,16.923
N16788994: F5V_6.2 R70.2 | length 1.2
  TOP w0.6: F5V_6.2@25.9,19.523 R70.2@27.15,19.523
NFDU4: CNPWM4.2 HS4.3 | length 164.5
  TOP w0.3: CNPWM4.2@82.076,2.775 82.076,8.876 82.349,9.149 99.049,9.149 99.5,9.6 v1(99.5,9.9) ; v1(141.25,50.25) 140,50.25 138.2,52.05 138.2,59.65 139.95,61.4 139.95,69.3 141.916,71.266 148.149,71.266 149.58,72.697 149.58,78.069 145.98,81.669 145.98,90.275 143.655,92.6 HS4.3@143.1,92.6
  LAYER3 w0.3: v1(99.5,9.9) 99.5,9.4 99.934,8.966 105.766,8.966 108.266,11.466 119.034,11.466 120.1,10.4 134.3,10.4 146.884,22.984 146.884,32.816 140.874,38.826 140.874,49.874 v1(141.25,50.25)
NFDU5: CNPWM4.22 HS5.3 | length 126.8
  TOP w0.3: CNPWM4.22@69.376,2.775 69.376,9.476 70.7,10.8 74.3,10.8 74.6,10.5 79.8,10.5 80.449,11.149 93.549,11.149 95.5,13.1 95.5,18.3 94.1,19.7 93.1,19.7 92.6,19.2 v1(92.6,19) ; HS5.3@95.02,92.6 95.575,92.6 97.9,90.275 97.9,83.469 100.3,81.069 100.3,72.731 98.569,71 95.869,71 93.2,68.331 93.2,60.532 v1(95.116,58.616)
  BOTTOM w0.3: v1(92.6,19) 91.734,19.866 91.734,30.534 93.034,31.834 93.034,56.534 v1(95.116,58.616)
NFDU6: CNPWM4.62 HS6.3 | length 100.4
  TOP w0.3: CNPWM4.62@42.706,2.775 42.706,9.106 43,9.4 v1(43.3,9.4) ; HS6.3@47.02,92.6 47.575,92.6 49.9,90.275 49.9,83.469 52.3,81.069 52.3,73.231 50.869,71.8 47.169,71.8 45.2,69.831 45.2,61.669 47.216,59.653 v1(47.216,58.616)
  BOTTOM w0.3: v1(43.3,9.4) 43.2,9.5 43.2,14 44.534,15.334 44.534,24.034 46.634,26.134 46.634,58.034 v1(47.216,58.616)
NFDV4: CNPWM4.4 HS4.4 | length 169.2
  TOP w0.3: CNPWM4.4@80.806,2.775 80.806,9.106 81.349,9.649 98.449,9.649 v1(98.7,9.9) ; v1(141.25,51.25) 140,51.25 138.858,52.392 138.858,59.378 140.608,61.128 140.608,68.958 142.116,70.466 148.48,70.466 150.38,72.366 150.38,78.4 146.78,82 146.78,90.72 HS4.4@143.1,94.4
  LAYER3 w0.3: v1(98.7,9.9) 98.7,9.3 99.6,8.4 106,8.4 108.5,10.9 118.8,10.9 119.9,9.8 134.5,9.8 147.45,22.75 147.45,33.05 141.44,39.06 141.44,49.24 141.9,49.7 141.9,51 141.65,51.25 v1(141.25,51.25)
NFDV5: CNPWM4.24 HS5.4 | length 127.2
  TOP w0.3: CNPWM4.24@68.106,2.775 68.106,9.106 70.3,11.3 74.549,11.3 74.849,11 79.451,11 80.1,11.649 93.341,11.649 95,13.307 95,18.093 94.093,19 v1(93.4,19) ; HS5.4@95.02,94.4 98.7,90.72 98.7,83.8 101.1,81.4 101.1,72.4 98.9,70.2 96.2,70.2 94,68 94,60.8 95.916,58.884 v1(95.916,58.616)
  BOTTOM w0.3: v1(93.4,19) 93.4,19.2 92.3,20.3 92.3,30.3 93.6,31.6 93.6,56 95.916,58.316 v1(95.916,58.616)
NFDV6: CNPWM4.64 HS6.4 | length 104
  TOP w0.3: CNPWM4.64@41.436,2.775 41.436,9.436 42.1,10.1 43.8,10.1 v1(43.9,10) ; HS6.4@47.02,94.4 50.7,90.72 50.7,83.8 53.1,81.4 53.1,72.9 51.2,71 47.5,71 46,69.5 46,62 48.016,59.984 v1(48.016,58.616)
  BOTTOM w0.3: v1(43.9,10) 43.9,13.9 45.1,15.1 45.1,23.8 47.2,25.9 47.2,57.4 48.016,58.216 v1(48.016,58.616)
NIPMF_4: IPM4.14 R96.2 R97.2 | length 48.9
  TOP w0.6: R96.2@117.45,23.4 R97.2@117.45,24.8 v1(117.45,25.8)
  BOTTOM w0.6: v1(117.45,25.8) 119.35,23.9 131.966,23.9 134.3,26.234 134.3,33.148 135.993,34.841 135.993,36.135 130,42.129 130,48.4 128.946,49.454 IPM4.14@128.946,50.5
NIPMF_5: IPM5.14 R102.2 R103.2 | length 54.7
  TOP w0.6: R102.2@71.55,23.136 R103.2@71.55,24.536 v1(71.55,25.536)
  BOTTOM w0.6: v1(71.55,25.536) 73.773,23.314 86.4,23.314 89.9,26.814 89.9,30.014 88.3,31.614 88.3,32.714 89,33.414 90.5,33.414 91.4,34.314 91.4,36.114 84.1,43.414 84.1,47.514 82.964,48.65 81.65,48.65 81.046,49.254 IPM5.14@81.046,50.5
NIPMF_6: IPM6.14 R107.2 R108.2 | length 56.1
  TOP w0.6: R107.2@25.15,23.123 R108.2@25.15,24.523 v1(25.15,25.523)
  BOTTOM w0.6: v1(25.15,25.523) 27.373,23.3 40,23.3 43.5,26.8 43.5,30 41.9,31.6 41.9,32.7 42.6,33.4 44.1,33.4 45,34.3 45,36.1 37.7,43.4 37.7,47.5 36.5,48.7 33.8,48.7 33.146,49.354 IPM6.14@33.146,50.5
NM_ON4: CNPWM4.6 R17.1 | length 72.5
  TOP w0.3: CNPWM4.6@79.536,2.775 79.536,9.236 79.8,9.5 80.4,9.5 81.049,10.149 97.349,10.149 v1(98.6,11.4) ; v1(132.6,21.577) 132.6,21.3 133.15,20.75 134.8,20.75 135.05,21 R17.1@135.05,21.5
  BOTTOM w0.3: v1(98.6,11.4) 98.5,11.5 98.5,18.45 101.1,21.05 104.9,21.05 105.427,21.577 v1(132.6,21.577)
NM_ON5: CNPWM4.26 R48.1 | length 48.9
  TOP w0.3: CNPWM4.26@66.836,2.775 66.836,9.036 69.6,11.8 74.756,11.8 75.056,11.5 79.2,11.5 79.849,12.149 93.134,12.149 94.5,13.514 94.5,17.886 94.086,18.3 89.8,18.3 89.05,19.05 R48.1@89.05,21.614
NM_ON6: CNPWM4.66 R79.1 | length 19.9
  TOP w0.3: CNPWM4.66@40.166,2.775 40.166,9.566 41.4,10.8 41.4,19.8 42.65,21.05 R79.1@42.65,21.6
OUT: OP1.7 OP2.7 OP3.7 | length 111.7
  TOP w0.6: OP3.7@41.115,43.2 41.115,44.315 41.4,44.6 42.1,44.6 42.7,45.2 42.7,45.8 43.7,46.8 76.3,46.8 78.8,44.3 v1(78.8,41.8) ; v1(84.9,40.3) 86,40.3 87.515,41.815 OP2.7@87.515,43.214 87.515,44.115 88.1,44.7 88.3,44.7 91,47.4 123.5,47.4 124.6,46.3 v1(124.6,42.3) ; v1(130.6,40.1) 131.7,40.1 133.415,41.815 OP1.7@133.415,43.227
  BOTTOM w0.6: v1(78.8,41.8) 83.4,41.8 v1(84.9,40.3) ; v1(124.6,42.3) 124.6,40.6 125.1,40.1 v1(130.6,40.1)
P_IPM4: CS4.1 CS5.1 CS6.1 CST4.1 CST5.1 CST6.1 F2.1 IPM4.24 IPM5.24 IPM6.24 | length 181.1
  TOP w1: CST6.1@31.6,71.35 32.3,70.65 v1(32.3,70.5) ; CST6.1@31.6,71.35 CST6.1@31.1,71.85 32.55,71.85 33,71.4 v1(33,70.5) v1(32.3,70.5) ; CST6.1@31.6,71.35 v1(31.6,70.5) v1(32.3,70.5) ; CST5.1@79.5,71.35 v1(79.5,70.5) v1(80.2,70.5) ; CST5.1@79.5,71.35 CST5.1@79,71.85 80.45,71.85 80.9,71.4 v1(80.9,70.5) v1(80.2,70.5) ; CST5.1@79.5,71.35 80.2,70.65 v1(80.2,70.5) ; CST4.1@127.4,71.35 v1(127.4,70.5) v1(128.1,70.5) ; CST4.1@127.4,71.35 128.1,70.65 v1(128.1,70.5) ; CST4.1@127.4,71.35 126.9,71.85 CST4.1@127.18,71.85 128.35,71.85 128.8,71.4 v1(128.8,70.5) v1(128.1,70.5)
  BOTTOM w2: IPM6.24@13.08,79.9 10.4,77.22 CS6.1@10.4,74.55 14.45,70.5 v1(29.5,70.5) v1(30.2,70.5) v1(30.9,70.5) v1(31.6,70.5) v1(32.3,70.5) v1(33,70.5) 49.7,70.5 53.75,74.55 CS5.1@58.3,74.55 ; IPM5.24@60.98,79.9 58.3,77.22 CS5.1@58.3,74.55 62.35,70.5 v1(77.4,70.5) v1(78.1,70.5) v1(78.8,70.5) v1(79.5,70.5) v1(80.2,70.5) v1(80.9,70.5) 99.75,70.5 103.8,74.55 CS4.1@106.2,74.55 ; IPM4.24@108.88,79.9 106.2,77.22 CS4.1@106.2,74.55 ; 141.3,67.6 138.4,70.5 v1(128.8,70.5) v1(128.1,70.5) v1(127.4,70.5) v1(126.7,70.5) v1(126,70.5) v1(125.3,70.5) 110.25,70.5 CS4.1@106.2,74.55
  other v1: 143.25,45.65 144.05,45.65 144.85,45.65 145.65,45.65 143.25,46.45 144.05,46.45 144.85,46.45 145.65,46.45 143.25,47.25 144.05,47.25 144.85,47.25 145.65,47.25 142.9,66 143.7,66 144.5,66 142.9,66.8 143.7,66.8 144.5,66.8 142.9,67.6 143.7,67.6 144.5,67.6 142.9,68.4 143.7,68.4 144.5,68.4
PWM_UN4: CNPWM4.7 PC2.3 R6.2 | length 82.6
  TOP w0.6: R6.2@128.6,30.037 129.07,30.507 v1(129.07,31.223) v1@129.07,31.262 ; v1@129.07,31.262 PC2.3@129.07,32.853
  BOTTOM w0.3: CNPWM4.7@78.266,2.775 78.266,9.911 79.004,10.649 94.503,10.649 96.1,12.246 96.1,21.454 95.4,22.154 95.4,28.546 98.854,32 114.3,32 116.4,29.9 117.8,29.9 119,31.1 122.1,31.1 122.7,30.5 123.5,30.5 124.223,31.223 v1(129.07,31.223)
PWM_UN5: CNPWM4.27 PC11.3 R37.2 | length 76.6
  TOP w0.6: R37.2@82.7,30.023 83.17,30.493 v1(83.17,31.209) 83.17,31.248 PC11.3@83.17,32.839
  BOTTOM w0.3: CNPWM4.27@65.566,2.775 65.566,10.531 62.997,13.1 58.497,13.1 57,14.597 57,16.597 55.797,17.8 53.654,17.8 49.3,22.154 49.3,28.446 52.854,32 68.3,32 70.4,29.9 71.9,29.9 73.1,31.1 76,31.1 76.6,30.5 77.8,30.5 78.509,31.209 v1(83.17,31.209)
PWM_UN6: CNPWM4.67 PC20.3 R68.2 | length 99.6
  TOP w0.6: R68.2@36.3,30.014 36.77,30.484 v1(36.77,31.2) v1@36.77,31.239 ; v1@36.77,31.239 PC20.3@36.77,32.83
  BOTTOM w0.3: v1(36.77,31.2) 36.732,31.239 32.039,31.239 31.3,30.5 30.5,30.5 29.9,31.1 26.849,31.1 25.649,29.9 24.1,29.9 22,32 6.454,32 3.15,28.696 3.15,22.104 8.1,17.154 8.1,11.697 10.397,9.4 14.603,9.4 17.403,12.2 26.597,12.2 27.597,11.2 36.5,11.2 38.1,9.6 38.5,9.6 38.896,9.204 CNPWM4.67@38.896,2.775
PWM_UP4: CNPWM4.1 PC1.3 R3.2 | length 58
  TOP w0.6: R3.2@110.6,30.037 111.07,30.507 v1(111.07,31.223) v1@111.07,31.262 ; v1@111.07,31.262 PC1.3@111.07,32.853
  BOTTOM w0.3: CNPWM4.1@82.076,2.775 82.076,8.876 82.349,9.149 95.549,9.149 97.9,11.5 97.9,22.2 97.2,22.9 97.2,27.485 100.515,30.8 104.2,30.8 104.5,30.5 105.6,30.5 106.323,31.223 v1(111.07,31.223)
PWM_UP5: CNPWM4.21 PC10.3 R34.2 | length 54.9
  TOP w0.6: R34.2@64.7,30.023 65.17,30.493 v1(65.17,31.209) 65.17,31.248 PC10.3@65.17,32.839
  BOTTOM w0.3: v1(65.17,31.209) 60.609,31.209 59.9,30.5 58.8,30.5 58.5,30.8 54.686,30.8 51.1,27.214 51.1,22.9 54.4,19.6 56.543,19.6 58.8,17.343 58.8,15.343 59.243,14.9 63.743,14.9 69.376,9.267 CNPWM4.21@69.376,2.775
PWM_UP6: CNPWM4.61 PC19.3 R66.2 | length 72.9
  TOP w0.6: R66.2@18.3,30.014 18.77,30.484 v1(18.77,31.2) v1@18.77,31.239 ; v1@18.77,31.239 PC19.3@18.77,32.83
  BOTTOM w0.3: v1(18.77,31.2) 18.732,31.239 14.139,31.239 13.3,30.4 12.3,30.4 11.9,30.8 8.3,30.8 4.95,27.45 4.95,22.85 8.4,19.4 16.4,19.4 21.8,14 27.343,14 28.343,13 38.5,13 42.706,8.794 CNPWM4.61@42.706,2.775
PWM_VN4: CNPWM4.9 PC5.3 R12.2 | length 77.8
  TOP w0.6: R12.2@122.6,30.037 123.07,30.507 v1(123.07,31.223) v1@123.07,31.262 ; v1@123.07,31.262 PC5.3@123.07,32.853
  BOTTOM w0.3: CNPWM4.9@76.996,2.775 76.996,10.096 78.049,11.149 94.154,11.149 95.5,12.494 95.5,21.206 94.8,21.906 94.8,28.794 98.606,32.6 114.549,32.6 116.649,30.5 117.551,30.5 118.751,31.7 122.593,31.7 v1(123.07,31.223)
PWM_VN5: CNPWM4.29 PC14.3 R43.2 | length 70.9
  TOP w0.6: R43.2@76.7,30.023 77.17,30.493 v1(77.17,31.209) 77.17,31.248 PC14.3@77.17,32.839
  BOTTOM w0.3: CNPWM4.29@64.296,2.775 64.296,10.952 62.749,12.5 58.249,12.5 56.4,14.349 56.4,16.349 55.549,17.2 53.406,17.2 48.7,21.906 48.7,28.694 52.606,32.6 68.549,32.6 70.649,30.5 71.651,30.5 72.851,31.7 76.68,31.7 v1(77.17,31.209)
PWM_VN6: CNPWM4.69 PC23.3 R73.2 | length 93.6
  TOP w0.6: R73.2@30.3,30.014 30.77,30.484 v1(30.77,31.2) v1@30.77,31.239 ; v1@30.77,31.239 PC23.3@30.77,32.83
  BOTTOM w0.3: v1(30.77,31.2) 30.77,31.239 30.309,31.7 26.6,31.7 25.4,30.5 24.4,30.5 22.3,32.6 6.206,32.6 2.55,28.944 2.55,21.856 7.5,16.906 7.5,11.449 10.149,8.8 14.851,8.8 17.651,11.6 26.349,11.6 27.349,10.6 36.1,10.6 37.626,9.074 CNPWM4.69@37.626,2.775
PWM_VP4: CNPWM4.3 PC4.3 R10.2 | length 53.3
  TOP w0.6: R10.2@104.6,30.037 105.07,30.507 v1(105.07,31.223) v1@105.07,31.262 ; v1@105.07,31.262 PC4.3@105.07,32.853
  BOTTOM w0.3: CNPWM4.3@80.806,2.775 80.806,9.106 81.349,9.649 95.2,9.649 97.3,11.749 97.3,21.951 96.6,22.651 96.6,27.734 100.266,31.4 104.893,31.4 v1(105.07,31.223)
PWM_VP5: CNPWM4.23 PC13.3 R41.2 | length 49.3
  TOP w0.6: R41.2@58.7,30.023 59.17,30.493 v1(59.17,31.209) 59.17,31.248 PC13.3@59.17,32.839
  BOTTOM w0.3: v1(59.17,31.209) 58.98,31.4 54.438,31.4 50.5,27.462 50.5,22.651 54.151,19 56.294,19 58.2,17.094 58.2,15.094 58.994,14.3 63.494,14.3 68.106,9.688 CNPWM4.23@68.106,2.775
PWM_VP6: CNPWM4.63 PC22.3 R72.2 | length 67.3
  TOP w0.6: R72.2@12.3,30.014 12.77,30.484 v1(12.77,31.2) v1@12.77,31.239 ; v1@12.77,31.239 PC22.3@12.77,32.83
  BOTTOM w0.3: v1(12.77,31.2) 12.77,31.239 12.609,31.4 7.976,31.4 4.35,27.774 4.35,22.601 8.151,18.8 16.151,18.8 21.551,13.4 27.094,13.4 28.094,12.4 38.2,12.4 41.436,9.164 CNPWM4.63@41.436,2.775
PWM_WN4: CNPWM4.11 PC7.3 R18.2 | length 72.6
  TOP w0.6: R18.2@116.6,30.037 117.07,30.507 v1(117.07,31.223) v1@117.07,31.262 ; v1@117.07,31.262 PC7.3@117.07,32.853
  BOTTOM w0.3: CNPWM4.11@75.726,2.775 75.726,10.126 77.249,11.649 93.806,11.649 94.9,12.743 94.9,20.957 94.2,21.657 94.2,29.043 98.357,33.2 114.9,33.2 116.877,31.223 v1(117.07,31.223)
PWM_WN5: CNPWM4.31 PC16.3 R49.2 | length 65.4
  TOP w0.6: R49.2@70.7,30.023 71.17,30.493 v1(71.17,31.209) v1@71.17,31.248 ; v1@71.17,31.248 PC16.3@71.17,32.839
  BOTTOM w0.3: CNPWM4.31@63.026,2.775 63.026,9.276 63.6,9.85 63.6,10.8 62.5,11.9 58,11.9 55.8,14.1 55.8,16.1 55.3,16.6 53.157,16.6 48.1,21.657 48.1,28.943 52.357,33.2 68.9,33.2 70.891,31.209 v1(71.17,31.209)
PWM_WN6: CNPWM4.71 PC25.3 R80.2 | length 87.5
  TOP w0.6: R80.2@24.3,30.014 24.77,30.484 v1(24.77,31.2) v1@24.77,31.239 ; v1@24.77,31.239 PC25.3@24.77,32.83
  BOTTOM w0.3: v1(24.77,31.2) 24.77,31.239 22.809,33.2 5.957,33.2 1.95,29.193 1.95,21.607 6.9,16.657 6.9,11.2 9.9,8.2 15.1,8.2 17.9,11 26.1,11 27.1,10 35.656,10 36.356,9.3 CNPWM4.71@36.356,2.775
PWM_WP4: CNPWM4.5 PC6.3 R14.2 | length 48.7
  TOP w0.6: R14.2@98.6,30.023 99.07,30.493 v1(99.07,31.184) 99.07,31.248 PC6.3@99.07,32.853
  BOTTOM w0.3: CNPWM4.5@79.536,2.775 79.536,9.536 80.149,10.149 94.851,10.149 96.7,11.997 96.7,21.703 96,22.403 96,28.115 v1(99.07,31.184)
PWM_WP5: CNPWM4.25 PC15.3 R45.2 | length 43.7
  TOP w0.6: R45.2@52.7,30.009 53.17,30.48 v1(53.17,31.171) 53.17,31.234 PC15.3@53.17,32.839
  BOTTOM w0.3: v1(53.17,31.171) 49.9,27.901 49.9,22.403 53.903,18.4 56.046,18.4 57.6,16.846 57.6,14.846 58.746,13.7 63.246,13.7 66.836,10.109 CNPWM4.25@66.836,2.775
PWM_WP6: CNPWM4.65 PC24.3 R76.2 | length 61.6
  TOP w0.6: R76.2@6.3,30 6.77,30.47 v1(6.77,31.161) 6.77,31.225 PC24.3@6.77,32.83
  BOTTOM w0.3: v1(6.77,31.161) 6.707,31.161 3.75,28.205 3.75,22.353 7.903,18.2 15.8,18.2 21.2,12.8 26.846,12.8 27.846,11.8 37.9,11.8 40.166,9.534 CNPWM4.65@40.166,2.775
TEMP_4: IPM4.17 R29.2 R30.1 R32.1 | length 27.3
  TOP w0.6: R30.1@132.8,32.477 R32.1@134.2,32.477 ; R29.2@134.2,33.777 R32.1@134.2,32.477 ; v1(135.15,32.477) R32.1@134.2,32.477
  BOTTOM w0.6: IPM4.17@134.28,50.5 134.28,49.13 133.55,48.4 131.7,48.4 131,47.7 131,42.373 136.873,36.5 136.873,34.387 135.15,32.664 v1(135.15,32.477)
TEMP_5: IPM5.17 R59.2 R60.1 R61.1 | length 27.6
  TOP w0.6: R61.1@86.9,32.464 R60.1@88.3,32.464 ; R59.2@88.3,33.764 R60.1@88.3,32.464 ; v1(89.25,32.464) R60.1@88.3,32.464
  BOTTOM w0.6: IPM5.17@86.38,50.5 86.38,49.28 85.019,47.919 85.019,43.794 92.2,36.614 92.2,33.414 91.25,32.464 v1(89.25,32.464)
TEMP_6: IPM6.17 R91.2 R92.1 R93.1 | length 27.1
  TOP w0.6: R92.1@40.5,32.45 R93.1@41.9,32.45 ; R91.2@41.9,33.75 R93.1@41.9,32.45 ; v1(42.85,32.45) R93.1@41.9,32.45
  BOTTOM w0.6: IPM6.17@38.48,50.5 38.65,50.33 38.65,43.75 45.8,36.6 45.8,33.4 44.85,32.45 v1(42.85,32.45)
U_4: CNM4.1 HS4.6 | length 12.9
  BOTTOM w2: CNM4.1@119.76,85 126.2,85 128.05,83.15 HS4.6@131.9,83.15
U_5: CNM5.1 HS5.6 | length 12.7
  BOTTOM w2: CNM5.1@71.86,85 78.3,85 80.15,83.15 HS5.6@83.82,83.15
U_6: CNM6.1 HS6.6 | length 12.6
  BOTTOM w2: CNM6.1@23.96,85 30.4,85 32.25,83.15 HS6.6@35.82,83.15
UOUT_4: C2.2 EC3.2 HS4.7 IPM4.21 ZD1.2 | length 45
  TOP w1: C2.2@120.7,55.9 121.3,55.9 122.2,56.8 122.2,63.7 121.35,64.55 EC3.2@120.1,64.55 120.1,65.8 ZD1.2@122.6,68.3 122.6,68.825 118.4,73.025 118.4,75.675 122.625,79.9 IPM4.21@124.12,79.9
  TOP w2: IPM4.21@124.12,79.9 127.68,83.46 127.68,85.78 129.8,87.9 HS4.7@131.9,87.9
UOUT_5: C14.2 EC7.2 HS5.7 IPM5.21 ZD5.2 | length 44.9
  TOP w1: C14.2@72.8,55.9 73.4,55.9 74.3,56.8 74.3,63.7 73.45,64.55 EC7.2@72.2,64.55 72.2,65.8 ZD5.2@74.7,68.3 74.7,68.825 70.5,73.025 70.5,75.675 74.725,79.9 IPM5.21@76.22,79.9
  TOP w2: IPM5.21@76.22,79.9 79.78,83.46 79.78,85.78 81.9,87.9 HS5.7@83.82,87.9
UOUT_6: C26.2 EC11.2 HS6.7 IPM6.21 ZD9.2 | length 44.8
  TOP w1: C26.2@24.9,55.9 25.5,55.9 26.4,56.8 26.4,63.7 25.55,64.55 EC11.2@24.3,64.55 24.3,65.8 ZD9.2@26.8,68.3 26.8,68.825 22.6,73.025 22.6,75.675 26.825,79.9 IPM6.21@28.32,79.9
  TOP w2: IPM6.21@28.32,79.9 31.88,83.46 31.88,85.78 34,87.9 HS6.7@35.82,87.9
V_4: CNM4.2 HS4.8 | length 22.7
  BOTTOM w2: CNM4.2@115.8,85 115.8,87.55 119.05,90.8 122.3,90.8 128.8,97.3 HS4.8@131.9,97.3
V_5: CNM5.2 HS5.8 | length 22.5
  BOTTOM w2: CNM5.2@67.9,85 67.9,87.55 71.15,90.8 74.4,90.8 80.9,97.3 HS5.8@83.82,97.3
V_6: CNM6.2 HS6.8 | length 22.4
  BOTTOM w2: CNM6.2@20,85 20,87.55 23.25,90.8 26.5,90.8 33,97.3 HS6.8@35.82,97.3
VOUT_4: C3.2 EC4.2 HS4.9 IPM4.22 ZD2.2 | length 58.2
  TOP w1: C3.2@113.6,55.9 114.2,55.9 115.1,56.8 115.1,63.7 114.25,64.55 EC4.2@113,64.55 113,65.8 115.3,68.1 ZD2.2@115.3,68.3 115.3,76.16 IPM4.22@119.04,79.9
  TOP w2: IPM4.22@119.04,79.9 124.45,85.31 124.45,87.65 127.5,90.7 127.5,100.4 129.15,102.05 HS4.9@131.9,102.05

## Text inside footprints (layer, text, board x,y; h text height)
C27: PIN_NUMBER "2" at 17.8,55.9 h0.7; PIN_NUMBER "1" at 16,55.9 h0.7
C28: PIN_NUMBER "2" at 27.75,16.923 h0.7; PIN_NUMBER "1" at 25.95,16.923 h0.7
C29: PIN_NUMBER "2" at 25.3,21.323 h0.7 r180; PIN_NUMBER "1" at 27.1,21.323 h0.7 r180
C30: PIN_NUMBER "2" at 10.7,55.9 h0.7; PIN_NUMBER "1" at 8.9,55.9 h0.7
C31: PIN_NUMBER "2" at 30.3,53.3 h0.7; PIN_NUMBER "1" at 28.5,53.3 h0.7
C32: PIN_NUMBER "2" at 31.6,46.35 h0.7 r270; PIN_NUMBER "1" at 31.6,48.15 h0.7 r270